# Altium PCB euu.PcbDoc
Units mil, origin at the board's own origin, x right, y up, seen from the top; angles counter-clockwise.
Board outline 1968.5 x 1968.5 mil, 2 copper layers (Top Layer, Bottom Layer); 13 components, 59 nets, 102 pads, 0 vias.
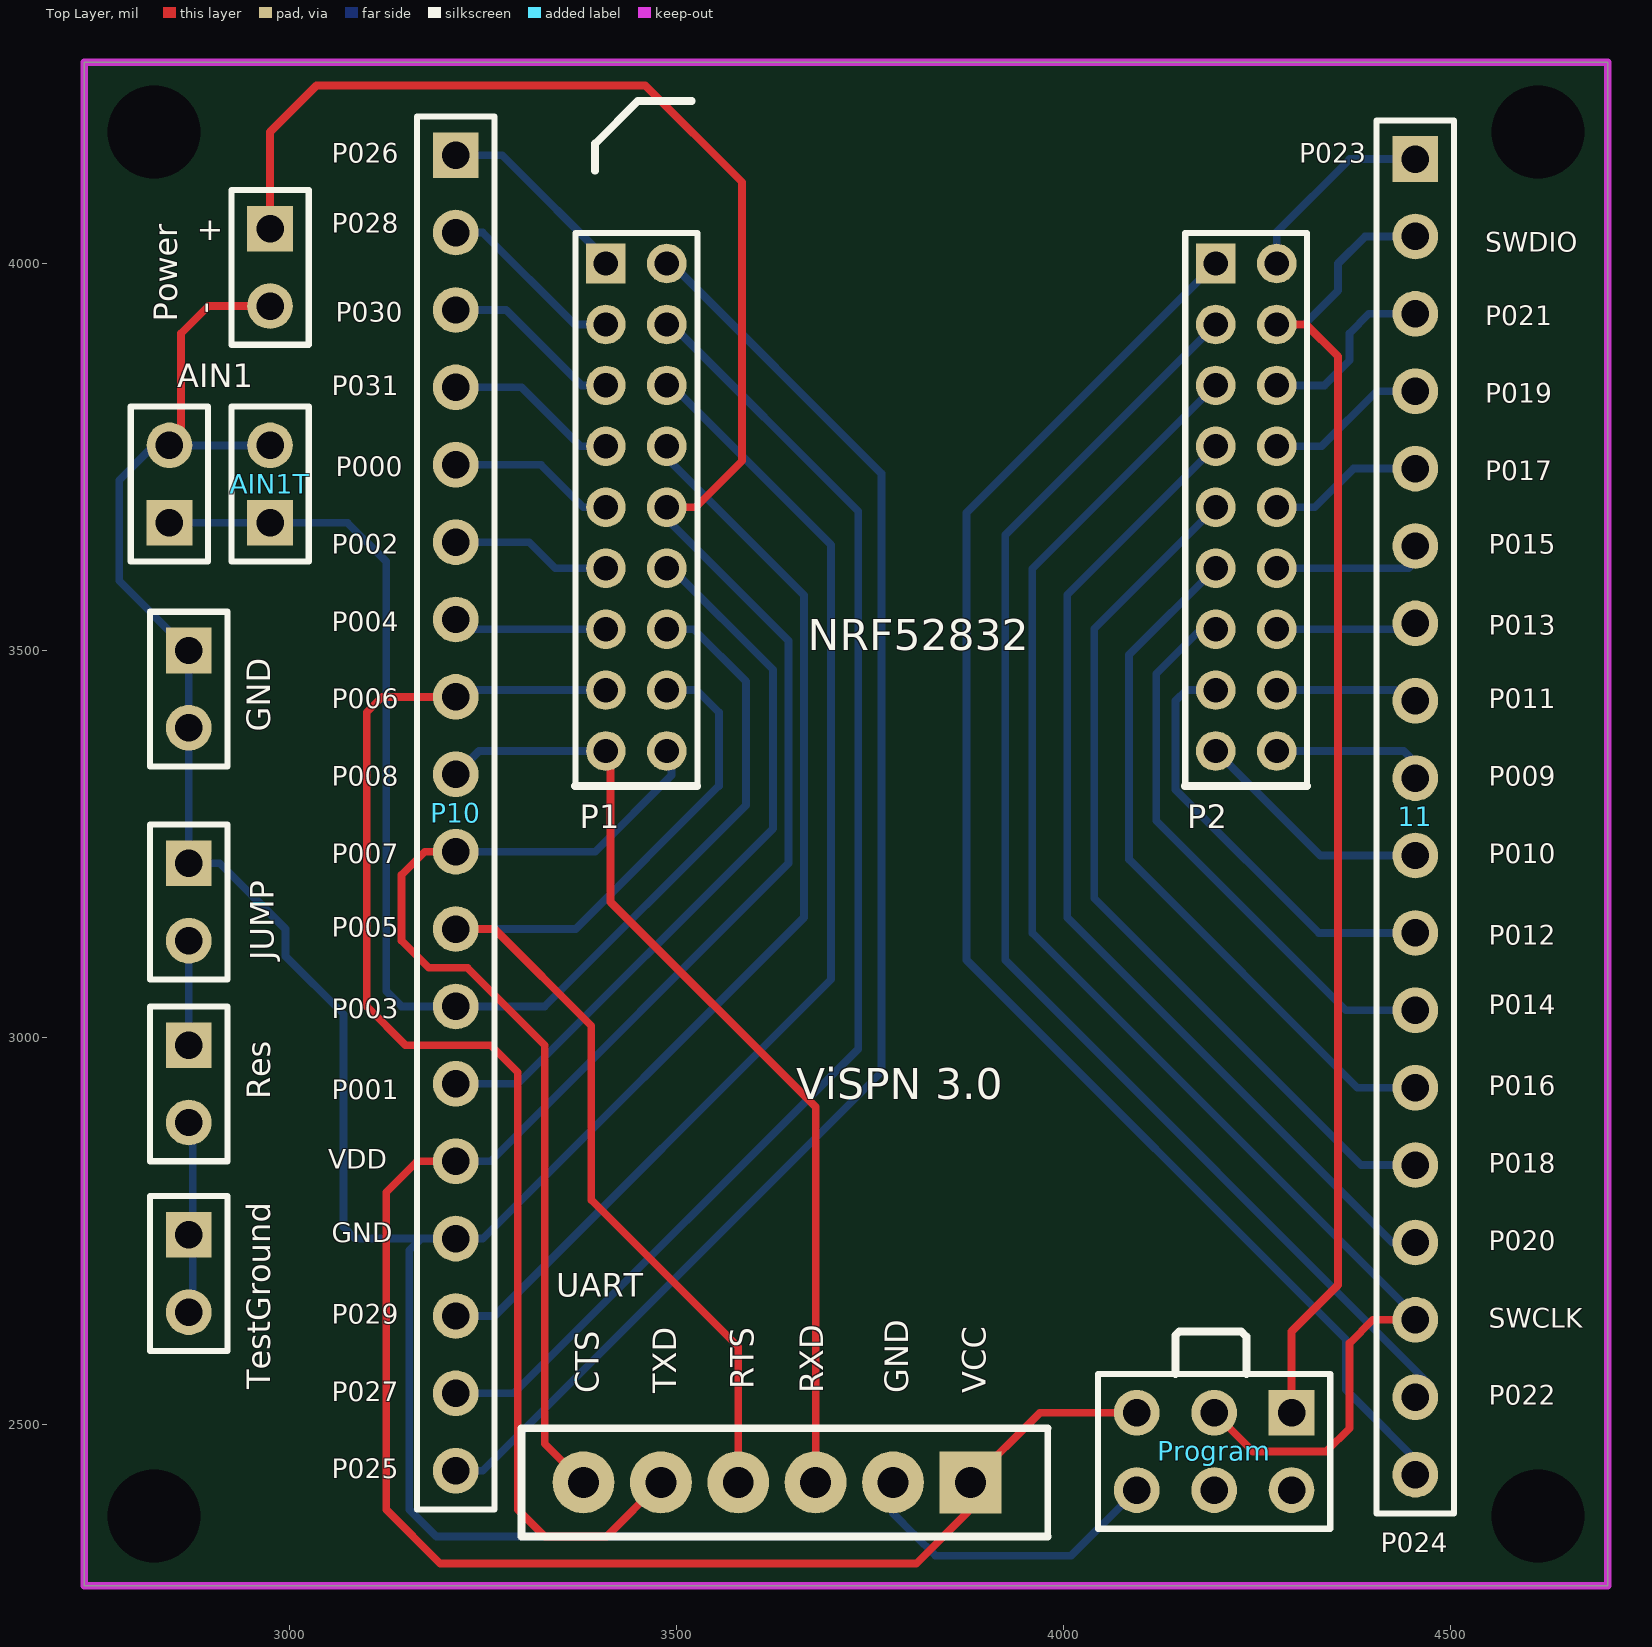
[diagram p0: Top Layer view]
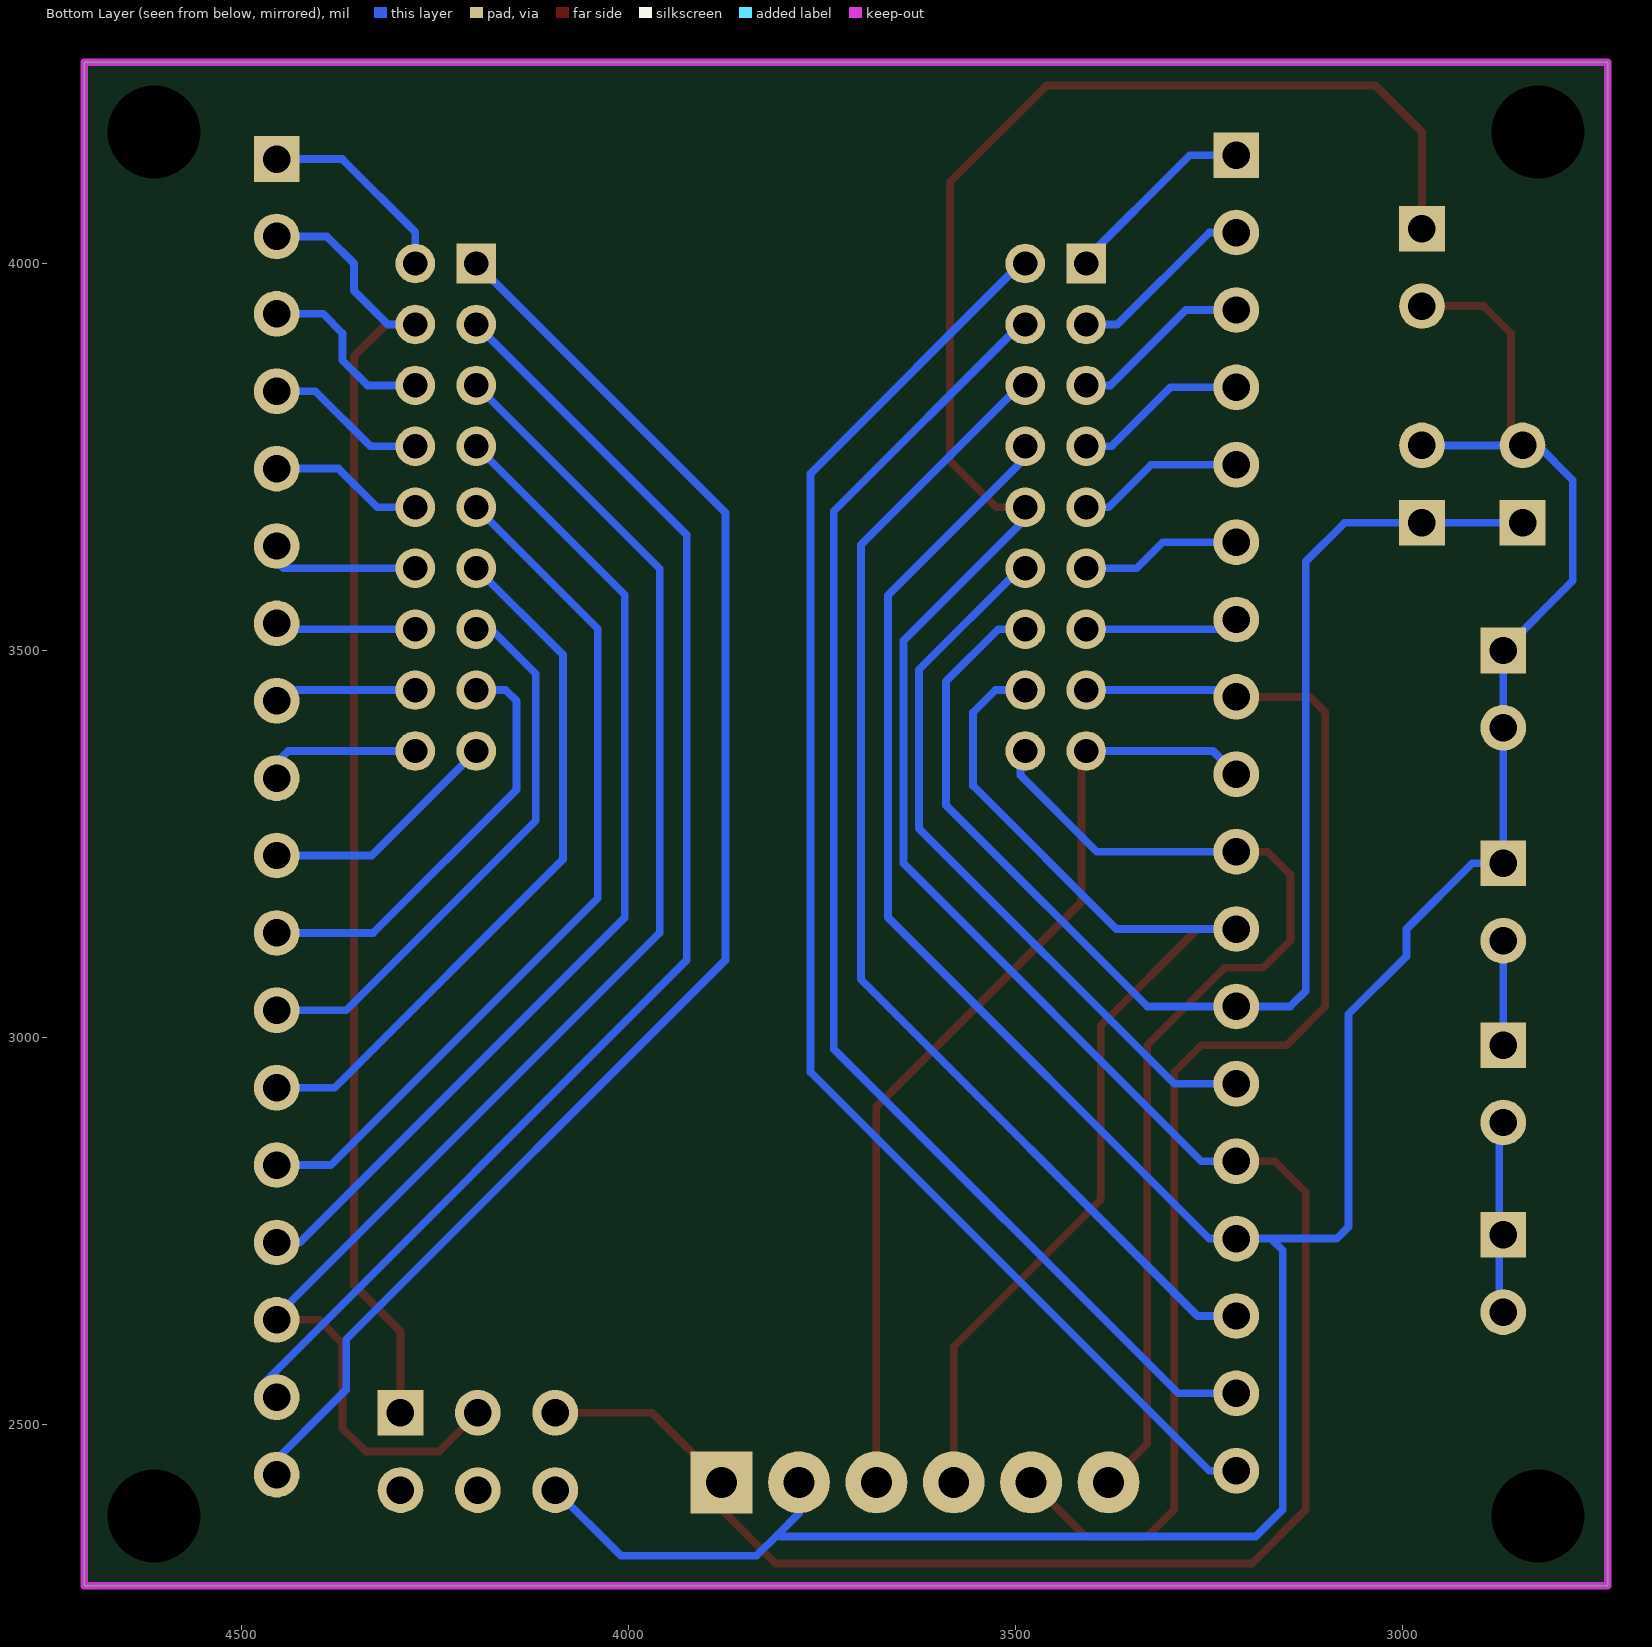
[diagram p1: Bottom Layer view, seen from below]

## Layer stack, top to bottom
Top Layer: signal copper 1.4
Dielectric: dielectric 12.6, FR-4, Dk 4.8
Bottom Layer: signal copper 1.4

## Board outline
2735,2291.5 2735,4260 4703.5,4260 4703.5,2291.5

## Design rules (kind name [scope] priority, off if disabled: settings)
Clearance [All] p1: gap=10
PolygonConnect [All] p1: connectstyle=Relief reliefconductorwidth=10 reliefentries=4 polygonreliefangle="90 Angle" airgapwidth=10
RoutingVias [All] p1: holewidth=28 width=50 viastyle="Through Hole" minholewidth=28 minwidth=50 maxholewidth=28 maxwidth=50
SolderMaskExpansion [All] p1: expansion=4
Width [All] p1: maxlimit=10 minlimit=10 preferedwidth=10
28 further rules are at their usual default settings.

## Components (designator, comment, footprint, x,y, rotation, side; value= is the part's Value field where it differs from the comment)
11 "Header 18" HDR1X18 4455,4135 r270 top
AIN1 "Header 2" HDR1X2 2845,3665 r90 top
AIN1T "Header 2" HDR1X2 2975,3665 r90 top
GND "Header 2" HDR1X2 2870,3500 r270 top (schematic designator test)
JUMP "Header 2" HDR1X2 2870,3225 r270 top (schematic designator connect)
P1 "2.00 mm_THT_Vertical_18 pin" Header9x2 3409,4000 r0 top
P2 "2.00 mm_THT_Vertical_18 pin" Header9x2 4197.01,4000 r0 top
P10 "Header 18" HDR1X18 3215,4140 r270 top
Power "Header 2" HDR1X2 2975,4045 r270 top
Program "Header 3X2" HDR2X3 4295,2515 r180 top
Res "Header 2" HDR1X2 2870,2990 r270 top
TestGround "Header 2" HDR1X2 2870,2745 r270 top
UART "MHDR1X6" HEADER6 3880,2425 r270 top

## Footprints (in the part's own frame and the unit in brackets; to place one, negate y for a bottom-side part, rotate by r counter-clockwise, add the part's x,y. Pads: shape width x height; smd on the part's side, far side on the other; paste and mask are expansions set on the pad)
HDR1X2 [mm] "Connector; Header; 2 Position"
  rect 1.5x1.5 hole 0.9: 1(0,0)
  round 1.5 hole 0.9: 2(2.54,0)
  silkscreen extent -1.27,-1.27 3.81,1.27
HDR1X18 [mm] "Connector; Header; 18 Position"
  rect 1.5x1.5 hole 0.9: 1(0,0)
  round 1.5 hole 0.9: 2(2.54,0) 3(5.08,0) 4(7.62,0) 5(10.16,0) 6(12.7,0) 7(15.24,0) 8(17.78,0) 9(20.32,0) 10(22.86,0) 11(25.4,0) 12(27.94,0) 13(30.48,0) 14(33.02,0) 15(35.56,0) 16(38.1,0) 17(40.64,0) 18(43.18,0)
  silkscreen extent -1.27,-1.27 44.45,1.27
HDR2X3 [mm] "Connector; Header; 3x2 Position"
  rect 1.5x1.5 hole 0.9: 1(0,0)
  round 1.5 hole 0.9: 2(0,2.54) 3(2.54,0) 4(2.54,2.54) 5(5.08,0) 6(5.08,2.54)
  silkscreen extent -1.27,-1.27 6.35,3.81
HEADER6 [mil]
  rect 80x80 hole 40: 1(0,0)
  round 80 hole 40: 2(0,-100) 3(0,-200) 4(0,-300) 5(0,-400) 6(0,-500)
  silkscreen extent -70,-580 70,100
Header9x2 [mm]
  rect 1.3x1.3 hole 0.8: 1(0,0)
  round 1.3 hole 0.8: 2(2,0) 3(0,-2) 4(2,-2) 5(0,-4) 6(2,-4) 7(0,-6) 8(2,-6) 9(0,-8) 10(2,-8) 11(0,-10) 12(2,-10) 13(0,-12) 14(2,-12) 15(0,-14) 16(2,-14) 17(0,-16) 18(2,-16)
  silkscreen extent -1.02,-17.14 3,1

## Part data
11 P10: "Header, 18-Pin"
AIN1 AIN1T GND JUMP Power Res TestGround: "Header, 2-Pin"
P1 P2: library part "Header 9X2", "Header, 9-Pin, Dual row"
Program: "Header, 3-Pin, Dual row"
UART: "Header, 6-Pin"

## Free pads (board coordinates)
  round 60 hole 120: 0(2825,2381.5) 0(2825,4170) 0(4613.5,2381.5) 0(4613.5,4170)

## Nets (pads, with @x,y where several pads share a name; then routed paths per layer and width w, separated by ;. In a path a pad name is that pad's centre, name@x,y a point inside that pad or via, vN(x,y) a via of type N, cw(c..) or ccw(c..) an arc to the next point about the centre after c; other vN are vias at no path point)
EXTI: 
GND: AIN1.2 AIN1T.2 GND.1 GND.2 JUMP.1 P1.8 P10.15 Power.2 Program.6 UART.2 | length 4481.8
  Top Layer w10: AIN1.2@2860,3770 2860,3910 2895,3945 Power.2
  Bottom Layer w10: AIN1.2@2825,3765 2780,3720 2780,3590 GND.1 GND.2 JUMP.1 2910,3225 2995,3140 2995,3105 3070,3030 3070,2755 3085,2740 3170,2740 ; AIN1.2 AIN1T.2@2995,3765 ; P1.8@3493.74,3763.78 3493.74,3742.44 3665,3571.18 3665,3155 3250,2740 P10.15 3170,2740 ; UART.2 3780,2385 3807.5,2357.5 ; Program.6 4010,2330 3835,2330 3807.5,2357.5 ; 3170,2740 3155,2725 3155,2390 3190,2355 3805,2355 3807.5,2357.5
HTH: 
LTH: 
NetC1_2: 
NetC2_2: 
NetC3_1: 
NetC4_1: 
Netconnect_2: JUMP.2 Res.1 | length 135
  Bottom Layer w10: Res.1 JUMP.2
NetD1_2: 
NetD2_1: 
NetD3_1: 
NetD4_2: 
NetD5_1: 
NetD5_2: 
NetD6_1: 
NetD6_2: 
NetL1_2: 
NetL2_1: 
NFC1_P0.09: 11.9 P2.18 | length 213.8
  Bottom Layer w10: P2.18 4439.92,3370.08 11.9@4475,3335
NFC2_P0.10: 11.10 P2.17 | length 333.9
  Bottom Layer w10: P2.17 4332.09,3235 11.10@4475,3235
P0.02: P1.11 P10.6 | length 214
  Bottom Layer w10: P10.6 3310,3640 3343.7,3606.3 P1.11@3415,3606.3
P0.03: AIN1.1 AIN1T.1 P1.14 P10.12 | length 1700.9
  Bottom Layer w10: AIN1.1@2865,3665 3075,3665 3125,3615 3125,3060 3145,3040 P10.12 3330,3040 3590,3300 3590,3460 3522.44,3527.56 P1.14@3493.74,3527.56
P0.04: P1.13 P10.7 | length 222.7
  Bottom Layer w10: P10.7@3197.44,3527.56 P10.7@3215,3527.56 ; P10.7 3227.44,3527.56 P1.13@3415,3527.56
P0.05: P1.16 P10.11 UART.4 | length 1480.3
  Top Layer w10: P10.11 3265,3140 3390,3015 3390,2790 3580,2600 UART.4
  Bottom Layer w10: P10.11 3370,3140 3555,3325 3555,3420 3526.18,3448.82 P1.16@3493.74,3448.82
P0.06: P1.15 P10.8 UART.5 | length 1748.2
  Top Layer w10: P10.8 3120,3440 3100,3420 3100,3040 3150,2990 3260,2990 3295,2955 3295,2390 3330,2355 3410,2355 UART.5
  Bottom Layer w10: P10.8@3193.82,3448.82 P1.15@3415,3448.82
P0.07: P1.18 P10.10 UART.6 | length 1345
  Top Layer w10: P10.10 3175,3240 3145,3210 3145,3125 3180,3090 3230,3090 3330,2990 3330,2475 UART.6
  Bottom Layer w10: P10.10 3395,3240 3493.74,3338.74 P1.18@3493.74,3370.08
P0.08: P1.17 P10.9 UART.3 | length 1267.3
  Top Layer w10: P1.17@3415,3370.08 3415,3175 3680,2910 UART.3
  Bottom Layer w10: P10.9 3245.08,3370.08 P1.17@3415,3370.08
P0.11: 11.8 P2.16 | length 185.4
  Bottom Layer w10: P2.16 11.8@4461.18,3448.82
P0.12: 11.11 P2.15 | length 579.4
  Bottom Layer w10: P2.15 4158.82,3448.82 4145,3435 4145,3320 4330,3135 11.11@4475,3135
P0.13: 11.7 P2.14 | length 191.8
  Bottom Layer w10: P2.14 11.7@4467.56,3527.56
P0.14: 11.12 P2.13 | length 747.3
  Bottom Layer w10: P2.13 4177.56,3527.56 4120,3470 4120,3280 4365,3035 11.12@4475,3035
P0.15: 11.6 P2.12 | length 211.1
  Bottom Layer w10: P2.12 4446.3,3606.3 11.6@4475,3635
P0.16: 11.13 P2.11 | length 934.9
  Bottom Layer w10: P2.11 4085,3494.29 4085,3230 4380,2935 11.13@4475,2935
P0.17: 11.5 P2.10 | length 219.9
  Bottom Layer w10: P2.10 4325.04,3685.04 4375,3735 11.5@4475,3735
P0.18: 11.14 P2.9 | length 1148
  Bottom Layer w10: P2.9 4040,3528.03 4040,3180 4385,2835 11.14@4475,2835
P0.19: 11.4 P2.8 | length 228.8
  Bottom Layer w10: P2.8 4333.78,3763.78 4405,3835 11.4@4475,3835
P0.20: 11.15 P2.7 | length 1332.3
  Bottom Layer w10: P2.7 4005,3571.77 4005,3155 4425,2735 11.15@4475,2735
P0.21: 11.3 P2.6 | length 258.1
  Bottom Layer w10: P2.6 4337.52,3842.52 4370,3875 4370,3910 4395,3935 11.3@4475,3935
P0.22: 11.17 P2.3 | length 1726.7
  Bottom Layer w10: P2.3 3925,3649.25 3925,3100 4475,2550 11.17@4475,2535
P0.23: 11.1 P2.2 | length 279
  Bottom Layer w10: P2.2 4275.75,4040.75 4370,4135 11.1@4475,4135
P0.24: 11.18 P2.1 | length 1946.9
  Bottom Layer w10: P2.1 3875,3677.99 3875,3100 4365,2610 4365,2545 11.18@4475,2435
P0.25: P1.2 P10.18 | length 1920.7
  Bottom Layer w10: P10.18 3250,2440 3765,2955 3765,3728.74 P1.2@3493.74,4000
P0.26: P1.1 P10.1 | length 258
  Bottom Layer w10: P10.1 3275,4140 P1.1@3415,4000
P0.27: P1.4 P10.17 | length 1740.5
  Bottom Layer w10: P10.17 3290,2540 3735,2985 3735,3680 P1.4@3493.74,3921.26
P0.28: P1.3 P10.2 | length 249.2
  Bottom Layer w10: P10.2 3250,4040 3368.74,3921.26 P1.3@3415,3921.26
P0.29: P1.6 P10.16 | length 1518.1
  Bottom Layer w10: P10.16 3265,2640 3700,3075 3700,3636.26 P1.6@3493.74,3842.52
P0.30: P1.5 P10.3 | length 240.4
  Bottom Layer w10: P10.3 3280,3940 3377.48,3842.52 P1.5@3415,3842.52
P0.31: P1.7 P10.4 | length 231.6
  Bottom Layer w10: P10.4 3300,3840 3376.22,3763.78 P1.7@3415,3763.78
SWCLK: 11.16 P2.5 Program.3 | length 1963.4
  Top Layer w10: Program.3 4245,2465 4340,2465 4370,2495 4370,2605 4400,2635 11.16@4475,2635
  Bottom Layer w10: P2.5 3960,3605.51 3960,3135 4460,2635 11.16@4475,2635
SWDIO: 11.2 P2.4 Program.1 | length 1753.1
  Top Layer w10: P2.4 4313.74,3921.26 4355,3880 4355,2680 4295,2620 Program.1
  Bottom Layer w10: P2.4 4311.26,3921.26 4355,3965 4355,4000 4390,4035 11.2@4475,4035
TEST_GND: Res.2 TestGround.1 TestGround.2 | length 249.1
  Bottom Layer w10: TestGround.2 2875,2650 2875,2885 Res.2
VDD: P1.10 P10.14 Power.1 Program.5 UART.1 | length 4016.7
  Top Layer w10: Power.1 2975,4170 3035,4230 3460,4230 3585,4105 3585,3745 3525.04,3685.04 P1.10@3493.74,3685.04 ; P10.14 3165,2840 3125,2800 3125,2390 3195,2320 3810,2320 3880,2390 UART.1 3970,2515 Program.5
  Bottom Layer w10: P10.14 3260,2840 3645,3225 3645,3512.44 3493.74,3663.7 P1.10@3493.74,3685.04
VIN+: 
VIN-: 
VOUT: 
VSTO: 
XL1_P0.00: P1.9 P10.5 | length 222.8
  Bottom Layer w10: P10.5 3325,3740 3379.96,3685.04 P1.9@3415,3685.04
XL2_P0.01: P1.12 P10.13 | length 937.4
  Bottom Layer w10: P10.13 3295,2940 3625,3270 3625,3475 P1.12@3493.74,3606.26
pads on no net: Program.2 Program.4

## Keep-outs
Keep-Out Layer:
  the board outline again, w10

## Silkscreen, mask and mechanical layers (free items; w line width, h text height)
Top Overlay:
  lines w10: 3520,4210 3450,4210 3395,4155 ; 4145,2565 4145,2615 4150,2620 4230,2620 4236.67,2613.33 4236.67,2565 ; 3395,4155 3395,4120 3395,4155
  text "P026" at 3055,4130 h25
  text "P023" at 4305,4130 h25
  text "P028" at 3055,4040 h25
  text "+" at 2880,4030 h30
  text "SWDIO" at 4545,4015 h25
  text "-" at 2905,3935 h30 r90
  text "P030" at 3060,3925 h25
  text "P021" at 4545,3920 h25
  text "P031" at 3055,3830 h25
  text "P019" at 4545,3820 h25
  text "P000" at 3060,3725 h25
  text "P017" at 4545,3720 h25
  text "P002" at 3055,3625 h25
  text "P015" at 4550,3625 h25
  text "P004" at 3055,3525 h25
  text "P013" at 4550,3520 h25
  text "NRF52832" at 3670,3500 h40
  text "P006" at 3055,3425 h25
  text "P011" at 4550,3425 h25
  text "P008" at 3055,3325 h25
  text "P009" at 4550,3325 h25
  text "P007" at 3055,3225 h25
  text "P010" at 4550,3225 h25
  text "P005" at 3055,3130 h25
  text "P012" at 4550,3120 h25
  text "P014" at 4550,3030 h25
  text "P003" at 3055,3025 h25
  text "P016" at 4550,2925 h25
  text "P001" at 3055,2920 h25
  text "ViSPN 3.0" at 3655,2920 h40
  text "VDD" at 3050,2830 h25
  text "P018" at 4550,2825 h25
  text "GND" at 3055,2735 h25
  text "P020" at 4550,2725 h25
  text "P029" at 3055,2630 h25
  text "SWCLK" at 4550,2625 h25
  text "RTS" at 3600,2545 h30 r90
  text "CTS" at 3400,2540 h30 r90
  text "TXD" at 3500,2540 h30 r90
  text "RXD" at 3690,2540 h30 r90
  text "GND" at 3800,2540 h30 r90
  text "VCC" at 3900,2540 h30 r90
  text "P027" at 3055,2530 h25
  text "P022" at 4550,2525 h25
  text "P025" at 3055,2430 h25
  text "P024" at 4410,2335 h25